# EAGLE board lightfun (EAGLE 7.2.0)
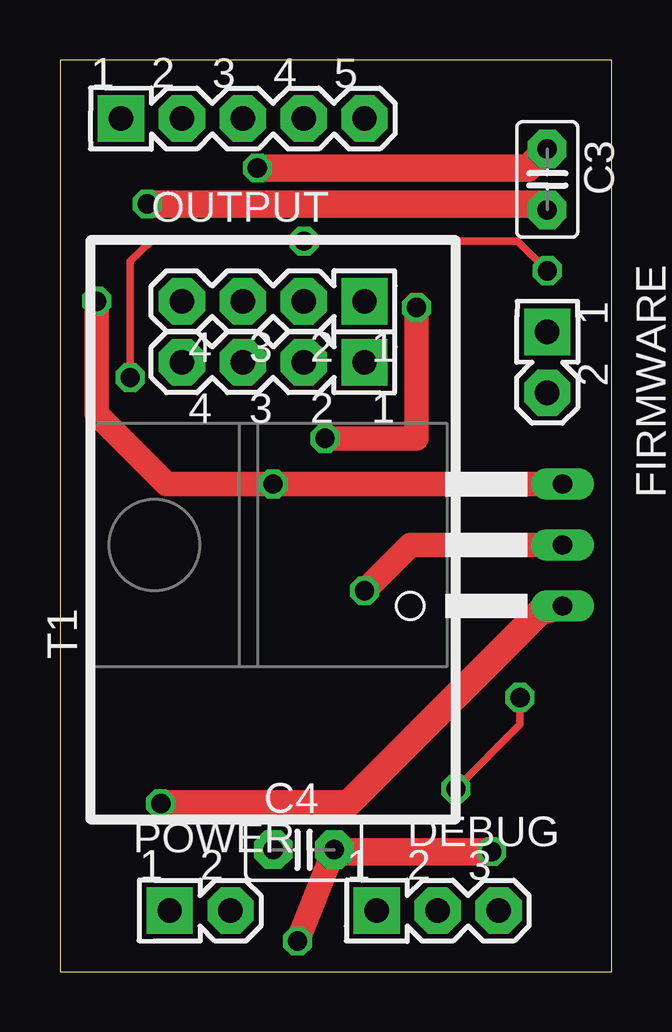
[diagram p0: board, top side]
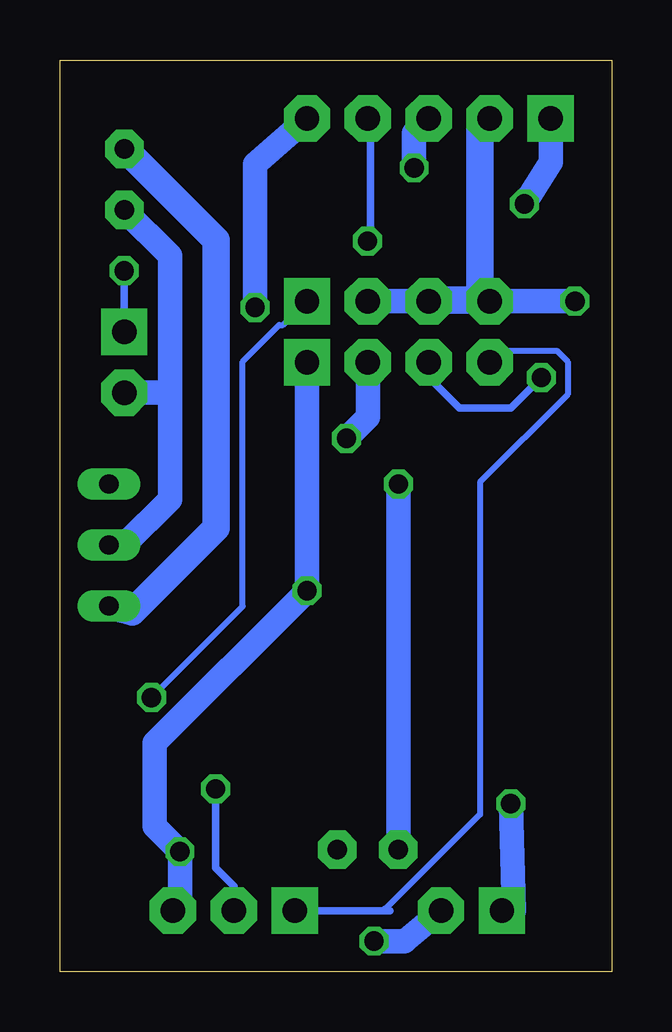
[diagram p1: board, bottom side, seen from below]

Size 23 x 38 mm. Coordinates in mm from the lower left corner, seen from the top.
Outline: 0,0 23,0 23,38 0,38 0,0
Copper layers (1*16): Top 0.035mm / dielectric 1.5mm / Bottom 0.035mm
Design rules "default": minimum track width 10mil, minimum drill 0.6mm, track to track 8mil, track to pad 8mil, pad to pad 8mil, via to via 8mil, smd to smd 8mil, copper to edge 40mil, drill to drill 8mil, minimum pad ring 10mil, minimum via ring 8mil, stop-mask expansion 4mil, vias tented up to drill 0mil, thermal gap 10mil
Net classes: 0 default: clearance 0.355 mm; 1 power-4A: width 2.642 mm; 2 comm-rs485: width 1.016 mm; 3 power-2A: width 1.143 mm

## Footprints (pad centres in the part's own frame; a part is rotated, then mirrored left to right if it is on the bottom)
C2.5-2 = drill 0.813 pad 1.6 octagon: 1 -1.27,0; 2 1.27,0
PIN-HEADER-3PIN = drill 1.016 pad 1.93 square: 1 -2.54,0 | drill 1.016 pad 1.93 octagon: 2 0,0; 3 2.54,0
PIN-HEADER-2PIN = drill 1.016 pad 1.93 square: 1 -1.27,0 | drill 1.016 pad 1.93 octagon: 2 1.27,0
PIN-HEADER-5PIN = drill 1.016 pad 1.93 square: 1 -5.08,0 | drill 1.016 pad 1.93 octagon: 2 -2.54,0; 3 0,0; 4 2.54,0; 5 5.08,0
PIN-HEADER-4PIN = drill 1.016 pad 1.93 square: 1 -3.81,0 | drill 1.016 pad 1.93 octagon: 2 -1.27,0; 3 1.27,0; 4 3.81,0
TO-220 = drill 0.8 long: GND 0,-8.89; INPUT -2.54,-8.89; OUTPUT 2.54,-8.89

## Placement (x,y rotation side)
C3  0.47uF  [C2.5-2]  20.32,33.02 270 top
C4  100uF  [C2.5-2]  10.16,5.08 0 top
DEBUG  RX TX GND  [PIN-HEADER-3PIN]  15.75,2.54 0 top
FIRMWARE  FIRMWARE  [PIN-HEADER-2PIN]  20.32,25.4 270 top
OUTPUT  GND 3.3V 5V IO0 IO2  [PIN-HEADER-5PIN]  7.62,35.56 0 top
P1  ESP8266  [PIN-HEADER-4PIN]  8.89,27.94 180 top
P2  ESP8266 CONNECTOR  [PIN-HEADER-4PIN]  8.89,25.4 180 top
POWER  +5V GND  [PIN-HEADER-2PIN]  5.84,2.54 0 top
T1  LM2937ET  [TO-220]  12.06,17.78 90 top

## Library data of the parts
C3 = capacitor-wima; MPN: 1C10Z5U104M050B
C4 = capacitor-wima; MPN: FK18X5R0J106M
DEBUG FIRMWARE OUTPUT P1 P2 POWER = stutz-eagle
T1 = stutz-eagle; MPN: LM2937ET-3.3

## Nets
+3.3V [power-2A]: C4.1 OUTPUT.2 P1.2 P1.3 P1.4 T1.OUTPUT
+5V [power-2A]: C3.1 OUTPUT.3 POWER.1 T1.INPUT
ESP_GPIO0: FIRMWARE.1 OUTPUT.4 P2.3
ESP_GPIO2: OUTPUT.5 P2.2
ESP_RX: DEBUG.1 P2.4
ESP_TX: DEBUG.2 P1.1
GND [power-2A]: C3.2 C4.2 DEBUG.3 FIRMWARE.2 OUTPUT.1 P2.1 POWER.2 T1.GND

## Tracks (layer width: path | path; a pad name or v marks a point on that pad's centre or on a via)
+3.3V  (via drill 0.8)
  Top 1.016: v1.52,27.94 1.52,23.24 4.45,20.32 v8.89,20.32 T1.OUTPUT
  Bottom 1.016: P1.3 P1.2 | P1.4 v1.52,27.94 | C4.1 v8.89,20.32
  Bottom 1.143: OUTPUT.2 5.5,35.5 5.5,28 P1.4 6,28 7.5,28 P1.3
+5V  (via drill 0.8)
  Top 1.143: v8.23,33.5 19.5,33.5 20,34 C3.1 | v4.21,7 12,7 20,15 T1.INPUT
  Bottom 1.016: v4.21,7 4.06,2.54 POWER.1 | v8.23,33.5 8.23,34.95 OUTPUT.3
  Bottom 1.143: C3.1 20,34 16.5,30.5 16.5,18.5 20,15 T1.INPUT
ESP_GPIO0  (via drill 0.8)
  Top 0.254: v10.18,30.45 3.81,30.45
  Top 0.305: v20.32,29.21 19.08,30.45 v10.18,30.45 | v2.92,24.77 2.92,29.62 3.81,30.45
  Bottom 0.254: 10.05,35.47 OUTPUT.4
  Bottom 0.305: FIRMWARE.1 v20.32,29.21 | 10.05,35.47 10.05,30.58 v10.18,30.45 | P2.3 7.62,24.77 6.35,23.5 4.19,23.5 v2.92,24.77
ESP_GPIO2  (via drill 0.8)
  Top 1.016: v11.05,22.23 14.86,22.23 v14.86,27.69
  Bottom 1.016: v14.86,27.69 14.86,33.66 OUTPUT.5 | P2.2 10.16,23.11 v11.05,22.23
ESP_RX
  Bottom 0.254: 9.44,2.59 5.48,6.55 5.48,20.4 1.83,24.05 1.83,25.43 2.28,25.88 4.57,25.88 5.02,25.43 P2.4
  Bottom 0.305: DEBUG.1 9.23,2.54 9.44,2.59
ESP_TX  (via drill 0.8)
  Top 0.305: v19.18,11.42 19.18,10.29 v16.51,7.62
  Bottom 0.254: v19.18,11.42 15.38,15.22 15.38,25.43 13.86,26.95 13.7,26.95 12.79,27.86 P1.1
  Bottom 0.305: v16.51,7.62 16.51,4.32 15.75,3.56 DEBUG.2
GND  (via drill 0.8)
  Top 1.016: v9.91,1.27 C4.2 | v12.7,15.88 14.61,17.78 T1.GND
  Top 1.143: v18,5 12,5 C4.2 | v3.63,32 20,32 C3.2
  Bottom 1.016: POWER.2 8.64,1.27 v9.91,1.27 | C3.2 18.41,29.84 18.41,24.13 | 18.41,24.13 FIRMWARE.2 | P2.1 v12.7,15.88 19.05,9.53 19.05,6.05 v18,5 18,2.57 DEBUG.3 | 18.41,24.13 18.41,19.68 20.32,17.78 T1.GND | v3.63,32 2.54,33.73 OUTPUT.1